# Altium PCB DUTBoard.PcbDoc (part 2 of 3)
Units mil, origin at the board's own origin, x right, y up, seen from the top; angles counter-clockwise.
Board outline 5475 x 5475 mil, 4 copper layers (Top Layer, Mid-Layer 1, Mid-Layer 2, Bottom Layer); 87 components, 471 nets, 1701 pads, 264 vias.
Unrouted connection lines stored in the file: 752.
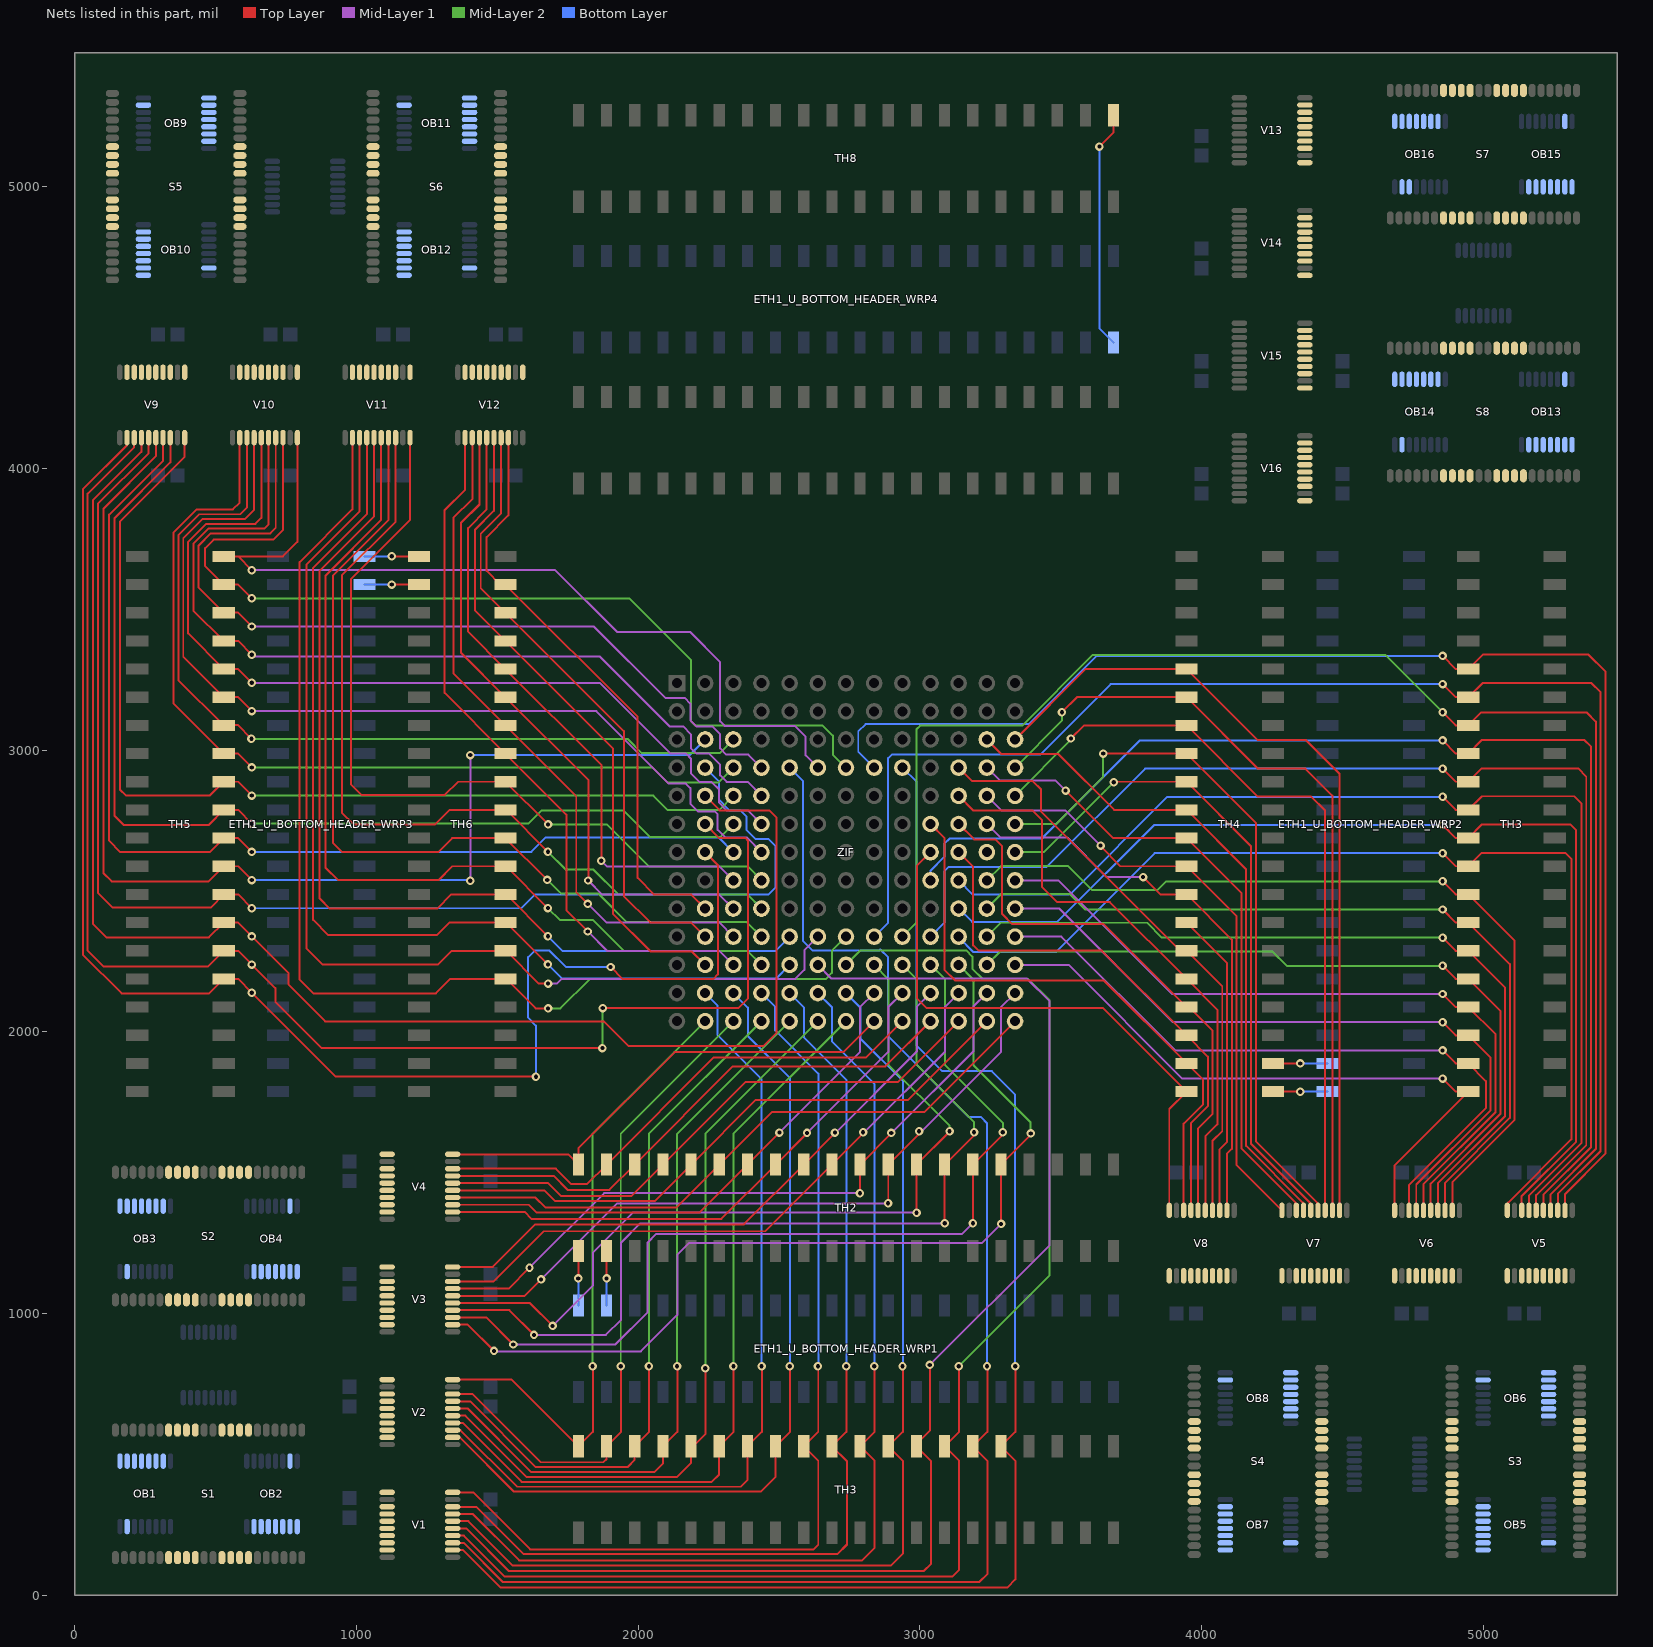
[diagram p4: the nets of this part, all layers, seen from the top]

## Via types
v1: diameter 30, hole 15, Top Layer to Bottom Layer, 264 vias

## Nets (pads, with @x,y where several pads share a name; then routed paths per layer and width w, separated by ;. In a path a pad name is that pad's centre, name@x,y a point inside that pad or via, vN(x,y) a via of type N, cw(c..) or ccw(c..) an arc to the next point about the centre after c; other vN are vias at no path point) (continued)
INSIDE_B33: TH6.39 V12.IVCC1 ZIF.34 | length 2111.8
  Top Layer w7: V12.IVCC1@1538.98,4108.86 1538.98,3832.98 1462,3756 1462,3636 1510.5,3587.5 TH6.39@1528.54,3587.5 1998,3118.04 1998,2546 2057,2487 2188,2487 ZIF.34@2237.5,2437.5
INSIDE_B34: TH6.38 V12.IVCC2 ZIF.35 | length 2216.2
  Top Layer w7: V12.IVCC2@1513.39,4108.86 1513.39,3840.39 1441,3768 1441,3575.04 TH6.38@1528.54,3487.5 1949,3067.04 1949,2481 2042,2388 2187,2388 ZIF.35@2237.5,2337.5
INSIDE_B35: TH6.37 V12.IVCC3 ZIF.36 | length 2323.6
  Top Layer w7: V12.IVCC3@1487.8,4108.86 1487.8,3848.8 1420,3781 1420,3496.04 TH6.37@1528.54,3387.5 1910,3006.04 1910,2419 2044,2285 2190,2285 ZIF.36@2237.5,2237.5
INSIDE_B36: TH6.36 V12.IVCC4 ZIF.37 | length 2222.5
  Top Layer w7: V12.IVCC4@1462.2,4108.86 1462.2,3854.2 1396,3788 1396,3420.04 TH6.36@1528.54,3287.5 1869,2947.04 v1(1869,2607)
  Mid-Layer 1 w7: v1(1869,2607) 1889,2587 2288,2587 ZIF.37@2337.5,2537.5
INSIDE_B37: TH6.35 V12.IVCC5 ZIF.38 | length 2345.4
  Top Layer w7: V12.IVCC5@1436.61,4108.86 1436.61,3871.61 1371,3806 1371,3345.04 TH6.35@1528.54,3187.5 1824,2892.04 v1@1824,2535
  Mid-Layer 1 w7: v1(1822,2537) 1872,2487 2288,2487 ZIF.38@2337.5,2437.5
INSIDE_B38: TH6.34 V12.IVCC6 ZIF.39 | length 2445
  Top Layer w7: V12.IVCC6@1411.02,4108.86 1411.02,3891.02 1344,3824 1344,3272.04 TH6.34@1528.54,3087.5 1780,2836.04 1780,2495 v1(1821,2454)
  Mid-Layer 1 w7: v1(1821,2454) 1887,2388 2287,2388 ZIF.39@2337.5,2337.5
INSIDE_B39: TH6.33 V12.IVCC7 ZIF.40 | length 2558.9
  Top Layer w7: V12.IVCC7@1385.43,4108.86 1385.43,3924.43 1313,3852 1313,3203.04 TH6.33@1528.54,2987.5 1745,2771.04 1745,2432 v1(1821,2356)
  Mid-Layer 1 w7: v1(1821,2356) 1891,2286 2289,2286 ZIF.40@2337.5,2237.5
INSIDE_B40: TH6.32 V11.IVCC0 ZIF.41 | length 2954.1
  Top Layer w7: V11.IVCC0@1190.16,4108.86 1190.16,3817.16 981,3608 981,2877 1017,2841 1314,2841 1360.5,2887.5 TH6.32@1528.54,2887.5 v1(1680.04,2736)
  Mid-Layer 2 w7: v1(1680.04,2736) 1889,2736 2038,2587 2388,2587 ZIF.41@2437.5,2537.5
INSIDE_B41: TH6.31 V11.IVCC1 ZIF.42 | length 3097.6
  Top Layer w7: V11.IVCC1@1138.98,4108.86 1138.98,3810.98 948,3620 948,2778 990,2736 1279,2736 1330.5,2787.5 TH6.31@1528.54,2787.5 TH6.31@1545.5,2787.5 ; TH6.31@1531.04,2787.5 v1(1679.54,2639)
  Mid-Layer 2 w7: v1(1679.54,2639) 1742.54,2576 1841,2576 1929,2488 2387,2488 ZIF.42@2437.5,2437.5
INSIDE_B42: TH6.30 V11.IVCC2 ZIF.43 | length 3220.3
  Top Layer w7: V11.IVCC2@1113.39,4108.86 1113.39,3816.39 916,3619 916,2671 949,2638 1290,2638 1339.5,2687.5 TH6.30@1528.54,2687.5 ; TH6.30@1528.54,2687.5 v1(1677,2539)
  Mid-Layer 2 w7: v1(1677,2539) 1726,2490 1859,2490 1960,2389 2386,2389 ZIF.43@2437.5,2337.5
INSIDE_B43: TH6.29 V11.IVCC3 ZIF.44 | length 3336.9
  Top Layer w7: V11.IVCC3@1087.8,4108.86 1087.8,3816.8 890,3619 890,2583 935,2538 1291,2538 1340.5,2587.5 TH6.29@1528.54,2587.5 ; TH6.29@1531.04,2587.5 v1(1679.54,2439)
  Mid-Layer 2 w7: v1(1679.54,2439) 1722.54,2396 1840,2396 1950,2286 2389,2286 ZIF.44@2437.5,2237.5
INSIDE_B44: TH6.28 V11.IVCC4 ZIF.45 | length 3522.5
  Top Layer w7: V11.IVCC4@1062.2,4108.86 1062.2,3829.2 869,3636 869,2473 905,2437 1286,2437 1336.5,2487.5 TH6.28@1528.54,2487.5 ; TH6.28@1531.04,2487.5 v1(1679.54,2339)
  Bottom Layer w7: v1(1679.54,2339) 1732.54,2286 2486,2286 ZIF.45@2537.5,2337.5
INSIDE_B45: TH6.27 V11.IVCC5 ZIF.46 | length 3622.9
  Top Layer w7: V11.IVCC5@1036.61,4108.86 1036.61,3837.61 846,3647 846,2397 900,2343 1285,2343 1329.5,2387.5 TH6.27@1528.54,2387.5 ; TH6.27@1531.04,2387.5 v1(1679.54,2239)
  Bottom Layer w7: v1(1679.54,2239) 1729.54,2189 2489,2189 ZIF.46@2537.5,2237.5
INSIDE_B46: TH6.26 V11.IVCC6 ZIF.47 | length 3906.1
  Top Layer w7: V11.IVCC6@1011.02,4108.86 1011.02,3847.02 823,3659 823,2295 880,2238 1288,2238 1337.5,2287.5 TH6.26@1528.54,2287.5 ; TH6.26@1531.04,2287.5 1647.54,2171 v1(1680,2171)
  Mid-Layer 1 w7: v1(1680,2171) 1711.54,2171 1728.54,2188 2558,2188 2590,2220 2590,2290 ZIF.47@2637.5,2337.5
INSIDE_B47: TH6.25 V11.IVCC7 ZIF.48 | length 4174.5
  Top Layer w7: V11.IVCC7@985.43,4108.86 985.43,3854.43 798,3667 798,2185 847,2136 1282,2136 1333.5,2187.5 TH6.25@1528.54,2187.5 ; TH6.25@1531.04,2187.5 1635.54,2083 v1(1680,2083)
  Mid-Layer 2 w7: v1(1680,2083) 1723.54,2083 1827.54,2187 2665,2187 2687,2209 2687,2287 ZIF.48@2737.5,2337.5
INSIDE_B48: TH5.40 V10.IVCC0 ZIF.49 | length 3182.3
  Top Layer w7: TH5.40@528.54,3687.5 579.5,3687.5 ; v1@628,3639 579.5,3687.5 ; V10.IVCC0@790.16,4108.86 790.16,3739.16 738.5,3687.5 579.5,3687.5
  Mid-Layer 1 w7: v1(628.5,3638.5) 1705.5,3638.5 1925,3419 2184,3419 2291,3312 2291,3102 2307,3086 2555,3086 2594,3047 2594,2981 ZIF.49@2637.5,2937.5
INSIDE_B49: TH5.39 V10.IVCC1 ZIF.50 | length 3430.9
  Top Layer w7: v1@628,3539 579.5,3587.5 TH5.39@528.54,3587.5 463,3653.04 463,3717 493,3747 705,3747 738.98,3780.98 V10.IVCC1@738.98,4108.86
  Mid-Layer 2 w7: v1(628.5,3538.5) 1968.5,3538.5 2187,3320 2187,3103 2203,3087 2655,3087 2691,3051 2691,2984 ZIF.50@2737.5,2937.5
INSIDE_B50: TH5.38 V10.IVCC2 ZIF.51 | length 3095.4
  Top Layer w7: v1@628,3439 579.5,3487.5 TH5.38@528.54,3487.5 440,3576.04 440,3726 483,3769 694,3769 713.39,3788.39 V10.IVCC2@713.39,4108.86
  Mid-Layer 1 w7: v1(628.5,3438.5) 1842.5,3438.5 2096,3185 2165,3185 2185,3165 2185,3105 2206,3084 2263,3084 2291,3056 2291,3006 2313,2984 2391,2984 ZIF.51@2437.5,2937.5
INSIDE_B51: TH5.37 V10.IVCC3 ZIF.52 | length 3179.4
  Top Layer w7: v1@628,3339 579.5,3387.5 TH5.37@528.54,3387.5 421,3495.04 421,3733 474,3786 672,3786 687.8,3801.8 V10.IVCC3@687.8,4108.86
  Mid-Layer 1 w7: v1(628.5,3338.5) 635,3332 1863,3332 2111,3084 2159,3084 2187,3056 2187,3007 2206,2988 2251,2988 2291,2948 2291,2910 2314,2887 2388,2887 ZIF.52@2437.5,2837.5
INSIDE_B52: TH5.36 V10.IVCC4 ZIF.53 | length 3278.7
  Top Layer w7: v1@628,3239 579.5,3287.5 TH5.36@528.54,3287.5 402,3414.04 402,3739 466,3803 641,3803 662.2,3824.2 V10.IVCC4@662.2,4108.86
  Mid-Layer 1 w7: v1(628.5,3238.5) 1863.5,3238.5 2115,2987 2170,2987 2187,2970 2187,2917 2218,2886 2261,2886 2287,2860 2287,2813 2315,2785 2390,2785 ZIF.53@2437.5,2737.5
INSIDE_B53: TH5.35 V10.IVCC5 ZIF.54 | length 3374.6
  Top Layer w7: v1@628,3139 579.5,3187.5 TH5.35@528.54,3187.5 385,3331.04 385,3752 453,3820 604,3820 636.61,3852.61 V10.IVCC5@636.61,4108.86
  Mid-Layer 1 w7: v1(628.5,3138.5) 1851.5,3138.5 2109,2881 2169,2881 2185,2865 2185,2809 2212,2782 2272,2782 2282,2772 2282,2717 2309,2690 2385,2690 ZIF.54@2437.5,2637.5
INSIDE_B54: TH5.34 V10.IVCC6 ZIF.55 | length 3145.4
  Top Layer w7: TH5.34@527,3089.04 577.96,3089.04 v1@626.46,3040.54 ; TH5.34@528.54,3087.5 368,3248.04 368,3763 442,3837 588,3837 611.02,3860.02 V10.IVCC6@611.02,4108.86
  Mid-Layer 2 w7: v1(626.96,3040.04) 1961.96,3040.04 2013,2989 2289,2989 ZIF.55@2337.5,3037.5
INSIDE_B55: TH5.33 V10.IVCC7 ZIF.56 | length 3241.1
  Top Layer w7: V10.IVCC7@585.5,4108.79 585.5,3878.5 561,3854 433,3854 350,3771 350,3166.04 TH5.33@528.54,2987.5 579.5,2987.5 v1@628,2939
  Mid-Layer 2 w7: v1(628.5,2938.5) 2050.5,2938.5 2105,2884 2284,2884 ZIF.56@2337.5,2937.5
INSIDE_B56: TH5.32 V9.IVCC0 ZIF.57 | length 3612.3
  Top Layer w7: V9.IVCC0@390.16,4108.86 390.16,4041.16 160,3811 160,2860 181,2839 480.04,2839 TH5.32@528.54,2887.5 579.5,2887.5 v1@628,2839
  Mid-Layer 2 w7: v1(628.5,2838.5) 2053.5,2838.5 2105,2787 2287,2787 ZIF.57@2337.5,2837.5
INSIDE_B57: TH5.31 V9.IVCC1 ZIF.58 | length 3754.1
  Top Layer w7: V9.IVCC1@338.98,4108.86 338.98,4020.98 141,3823 141,2767 174,2734 475.04,2734 TH5.31@528.54,2787.5 579.5,2787.5 v1@628,2739
  Mid-Layer 2 w7: v1(628.5,2738.5) 1609.5,2738.5 1657,2786 1947,2786 2042,2691 2291,2691 ZIF.58@2337.5,2737.5
INSIDE_B58: TH5.30 V9.IVCC2 ZIF.59 | length 3825.4
  Top Layer w7: V9.IVCC2@313.39,4108.86 313.39,4027.39 122,3836 122,2678 162,2638 479.04,2638 TH5.30@528.54,2687.5 579.5,2687.5 v1@628,2639
  Bottom Layer w7: v1(628.5,2638.5) 1620.5,2638.5 1672,2690 2285,2690 ZIF.59@2337.5,2637.5
INSIDE_B59: TH5.29 V9.IVCC3 ZIF.60 | length 4282.3
  Top Layer w7: V9.IVCC3@287.8,4108.86 287.8,4042.8 102,3857 102,2563 131,2534 475.04,2534 TH5.29@528.54,2587.5 579.5,2587.5 v1@628,2539
  Mid-Layer 1 w7: v1(1404,2536) v1(1404,2982)
  Bottom Layer w7: v1(628.5,2538.5) 1404.5,2538.5 v1@1405,2538 ; v1(1404,2982) 2182,2982 ZIF.60@2237.5,3037.5
INSIDE_B60: TH5.28 V9.IVCC4 ZIF.61 | length 4765
  Top Layer w7: V9.IVCC4@262.2,4108.86 262.2,4054.2 82,3874 82,2493 134,2441 482.04,2441 TH5.28@528.54,2487.5 579.5,2487.5 v1@628,2439
  Bottom Layer w7: v1(628.5,2438.5) 1584.5,2438.5 1633,2487 2462,2487 2487,2512 2487,2660 2463,2684 2417,2684 2384,2717 2384,2765 2364,2785 2325,2785 2287,2823 2287,2888 ZIF.61@2237.5,2937.5
INSIDE_B61: TH5.27 V9.IVCC5 ZIF.62 | length 5539.4
  Top Layer w7: V9.IVCC5@236.61,4108.86 236.61,4058.61 64,3886 64,2383 112,2335 476.04,2335 TH5.27@528.54,2387.5 579.5,2387.5 v1@628,2339 ; v1(628.5,2338.5) 759,2208 759,2167 889,2037 1878,2037 1966,1949 2443,1949 2491,1997 2491,2122.53 2491,2760 2465,2786 2289,2786 ZIF.62@2237.5,2837.5
INSIDE_B62: TH5.26 V9.IVCC6 ZIF.63 | length 5342.1
  Top Layer w7: V9.IVCC6@211.02,4108.86 211.02,4075.02 46,3910 46,2288 103,2231 472.04,2231 TH5.26@528.54,2287.5 579.5,2287.5 v1@628,2239 ; v1(628.5,2238.5) 712,2155 712,2106 876,1942 v1(1873,1942) ; v1(1874,2084) 2355,2084 2389,2118 2389,2679 2381,2687 2288,2687 ZIF.63@2237.5,2737.5
  Mid-Layer 2 w7: v1(1873,1942) v1@1873,2084
INSIDE_B63: TH5.25 V9.IVCC7 ZIF.64 | length 5352.9
  Top Layer w7: V9.IVCC7@185.43,4108.86 185.43,4082.43 29,3926 29,2273 166,2136 477.04,2136 TH5.25@528.54,2187.5 579.5,2187.5 v1@628,2139 ; v1(628.5,2138.5) 926,1841 v1@1639,1841 ; v1(1902,2230) 1945,2187 2266,2187 2283,2204 2283,2592 ZIF.64@2237.5,2637.5
  Bottom Layer w7: v1(1637,1840) 1637,2022 1609,2050 1609,2265 1632,2288 1685,2288 1743,2230 v1(1902,2230)
INSIDE_B64: TH4.40 V8.IVCC0 ZIF.65 | length 2080.2
  Top Layer w7: ZIF.65@3037.5,2637.5 2989,2589 2989,2119 3024,2084 3649.96,2084 TH4.40@3946.46,1787.5 3884.84,1725.89 V8.IVCC0@3884.84,1366.14
INSIDE_B65: TH4.39 V8.IVCC1 ZIF.66 | length 2109.4
  Top Layer w7: ZIF.66@3037.5,2737.5 3087,2688 3087,2220 3125,2182 3651.96,2182 TH4.39@3946.46,1887.5 4005,1828.96 4005,1743.04 3936.02,1674.07 V8.IVCC1@3936.02,1366.14
INSIDE_B66: TH4.38 V8.IVCC2 ZIF.67 | length 1919.3
  Top Layer w7: ZIF.67@3137.5,2637.5 3189,2586 3189,2307 3208,2288 3645.96,2288 TH4.38@3946.46,1987.5 4022,1911.96 4022,1736 3961.61,1675.61 V8.IVCC2@3961.61,1366.14
INSIDE_B67: TH4.37 V8.IVCC3 ZIF.68 | length 2006.4
  Top Layer w7: ZIF.68@3137.5,2737.5 3192,2683 3268,2683 3292,2659 3292,2418 3328,2382 3651.96,2382 TH4.37@3946.46,2087.5 ; TH4.37@3947.98,2094.02 4039,2003 4039,1709.21 3987.2,1657.41 V8.IVCC3@3987.2,1366.14
INSIDE_B68: TH4.36 V8.IVCC4 ZIF.69 | length 2102.2
  Top Layer w7: ZIF.69@3137.5,2837.5 3190,2785 3400,2785 3433,2752 3433,2514 3487,2460 3673.96,2460 TH4.36@3946.46,2187.5 4056,2077.96 4056,1671.61 4012.8,1628.41 V8.IVCC4@4012.8,1366.14
INSIDE_B69: TH4.35 V8.IVCC5 ZIF.70 | length 2089.6
  Top Layer w7: ZIF.70@3137.5,2937.5 3185,2890 3400,2890 3430,2860 3430,2781 TH4.35@3923.5,2287.5 ; TH4.35@3946.46,2287.5 4073,2160.96 4073,1647 4038.39,1612.39 V8.IVCC5@4038.39,1366.14
INSIDE_B70: TH4.34 V8.IVCC6 ZIF.71 | length 1095.5
  Top Layer w7: TH4.34@3946.46,2387.5 4090,2243.96 4090,1609 4063.98,1582.98 V8.IVCC6@4063.98,1366.14 V8.IVCC6@4061.24,1368.88
INSIDE_B71: TH4.33 V8.IVCC7 ZIF.72 | length 2007.6
  Top Layer w7: v1(3792,2549) 3853.5,2487.5 TH4.33@3946.46,2487.5 4107,2326.96 4107,1584.52 4089.57,1567.09 V8.IVCC7@4089.57,1366.14
  Mid-Layer 1 w7: ZIF.72@3237.5,2737.5 3285,2690 3522,2690 3663,2549 v1(3792,2549)
INSIDE_B72: TH4.32 V7.IVCC0 ZIF.73 | length 2176.8
  Top Layer w7: v1@3641,2662 v1(3641,2661) 3641,2658 3711.5,2587.5 TH4.32@3946.46,2587.5 4124,2409.96 4124,1526.98 V7.IVCC0@4284.84,1366.14
  Mid-Layer 1 w7: ZIF.73@3237.5,2837.5 3289,2786 3516,2786 v1(3641,2661)
INSIDE_B73: TH4.31 V7.IVCC1 ZIF.74 | length 2295.2
  Top Layer w7: v1(3517,2856) 3685.5,2687.5 TH4.31@3946.46,2687.5 4141,2492.96 4141,1586.1 4333.28,1393.82 4333.28,1368.88 V7.IVCC1@4336.02,1366.14
  Mid-Layer 1 w7: ZIF.74@3237.5,2937.5 3283,2892 3481,2892 v1(3517,2856)
INSIDE_B74: TH4.30 V7.IVCC2 ZIF.75 | length 2405.8
  Top Layer w7: ZIF.75@3237.5,3037.5 3289,2986 3491,2986 3689.5,2787.5 TH4.30@3946.46,2787.5 4158,2575.96 4158,1594.69 4358.87,1393.82 4358.87,1368.88 V7.IVCC2@4361.61,1366.14
INSIDE_B75: TH4.29 V7.IVCC3 ZIF.76 | length 2415
  Top Layer w7: v1@3689,2887 3689.5,2887.5 TH4.29@3946.46,2887.5 4175,2658.96 4175,1603.28 4384.46,1393.82 4384.46,1368.88 V7.IVCC3@4387.2,1366.14
  Mid-Layer 2 w7: ZIF.76@3337.5,2637.5 3439.5,2637.5 v1(3688,2886)
INSIDE_B76: TH4.28 V7.IVCC4 ZIF.77 | length 2575.7
  Top Layer w7: v1(3650.5,2987.5) TH4.28@3946.46,2987.5 4192,2741.96 4192,1611.87 4410.05,1393.82 4410.05,1368.88 V7.IVCC4@4412.8,1366.14
  Mid-Layer 2 w7: ZIF.77@3337.5,2737.5 3483.5,2737.5 3650.5,2904.5 v1(3650.5,2987.5)
INSIDE_B77: TH4.27 V7.IVCC5 ZIF.78 | length 2751.8
  Top Layer w7: v1(3536,3041) 3582.5,3087.5 TH4.27@3946.46,3087.5 4198.96,2835 4388.77,2835 4438.39,2785.39 V7.IVCC5@4438.39,1366.14
  Mid-Layer 2 w7: ZIF.78@3337.5,2837.5 3536,3036 v1(3536,3041)
INSIDE_B78: TH4.26 V7.IVCC6 ZIF.79 | length 2864.3
  Top Layer w7: v1(3504,3134) 3557.5,3187.5 TH4.26@3946.46,3187.5 4199.96,2934 4368,2934 4464,2838 V7.IVCC6@4464,1366.17
  Mid-Layer 2 w7: ZIF.79@3337.5,2937.5 3504,3104 v1(3504,3134)
INSIDE_B79: TH4.25 V7.IVCC7 ZIF.80 | length 2962.6
  Top Layer w7: ZIF.80@3337.5,3037.5 3587.5,3287.5 TH4.25@3946.46,3287.5 4197.96,3036 4368.52,3036 4489.57,2914.95 V7.IVCC7@4489.57,1366.14 V7.IVCC7@4492.31,1368.88
INSIDE_B80: TH3.40@4946.46,1787.5 V6.IVCC0 ZIF.81 | length 2325.1
  Top Layer w7: V6.IVCC0@4684.84,1366.14 4684.84,1525.89 TH3.40@4946.46,1787.5 4901.5,1787.5 v1(4855,1834)
  Mid-Layer 1 w7: ZIF.81@3337.5,2237.5 3527.5,2237.5 3931,1834 v1(4855,1834)
INSIDE_B81: TH3.39@4946.46,1887.5 V6.IVCC1 ZIF.82 | length 2456.1
  Top Layer w7: V6.IVCC1@4736.02,1366.14 4736.02,1456.27 5009,1729.25 5009,1824.96 TH3.39@4946.46,1887.5 4901.5,1887.5 v1(4855,1934)
  Mid-Layer 1 w7: ZIF.82@3337.5,2337.5 3338,2338 3502,2338 3906,1934 v1(4855,1934)
INSIDE_B82: TH3.38@4946.46,1987.5 V6.IVCC2 ZIF.83 | length 2563
  Top Layer w7: V6.IVCC2@4764.35,1368.88 V6.IVCC2@4761.61,1366.14 4761.61,1457.82 5026,1722.21 5026,1907.96 TH3.38@4946.46,1987.5 4901.5,1987.5 v1(4855,2034)
  Mid-Layer 1 w7: ZIF.83@3337.5,2437.5 3494.5,2437.5 3898,2034 v1(4855,2034)
INSIDE_B83: TH3.37@4946.46,2087.5 V6.IVCC3 ZIF.84 | length 2666.5
  Top Layer w7: V6.IVCC3@4789.95,1368.88 V6.IVCC3@4787.2,1366.14 4787.2,1459.37 5043,1715.17 5043,1990.96 TH3.37@4946.46,2087.5 4901.5,2087.5 v1(4855,2134)
  Mid-Layer 1 w7: ZIF.84@3337.5,2537.5 3491.5,2537.5 3895,2134 v1(4855,2134)
INSIDE_B84: TH3.36@4946.46,2187.5 V6.IVCC4 ZIF.85 | length 2743.7
  Top Layer w7: V6.IVCC4@4815.54,1368.88 V6.IVCC4@4812.8,1366.14 4812.8,1460.92 5060,1708.12 5060,2073.96 TH3.36@4946.46,2187.5 4901.5,2187.5 v1(4855,2234)
  Mid-Layer 2 w7: ZIF.85@3237.5,2237.5 3285,2285 4251,2285 4302,2234 v1(4855,2234)
INSIDE_B85: TH3.35@4946.46,2287.5 V6.IVCC5 ZIF.86 | length 2844.9
  Top Layer w7: V6.IVCC5@4838.39,1366.14 4838.39,1462.47 5077,1701.08 5077,2156.96 TH3.35@4946.46,2287.5 4901.5,2287.5 v1(4855,2334)
  Mid-Layer 2 w7: ZIF.86@3237.5,2337.5 3287,2387 3806,2387 3859,2334 v1(4855,2334)
INSIDE_B86: TH3.34@4946.46,2387.5 V6.IVCC6 ZIF.87 | length 2950.1
  Top Layer w7: v1(4855,2434) 4901.5,2387.5 TH3.34@4946.46,2387.5 5094,2239.96 5094,1694.04 4863.98,1464.02 V6.IVCC6@4863.98,1366.14
  Mid-Layer 2 w7: ZIF.87@3237.5,2437.5 3289,2489 3532,2489 3587,2434 v1(4855,2434)
INSIDE_B87: TH3.33@4946.46,2487.5 V6.IVCC7 ZIF.88 | length 3077.6
  Top Layer w7: v1(4855,2534) 4901.5,2487.5 TH3.33@4946.46,2487.5 5111,2322.96 5111,1687 4889.57,1465.57 V6.IVCC7@4889.57,1366.14
  Mid-Layer 2 w7: ZIF.88@3237.5,2537.5 3288,2588 3526,2588 3610,2504 3844,2504 3874,2534 v1(4855,2534)
INSIDE_B88: TH3.32@4946.46,2587.5 V5.IVCC0 ZIF.89 | length 3732.4
  Top Layer w7: v1(4855,2634) 4901.5,2587.5 TH3.32@4946.46,2587.5 4992.96,2634 5292,2634 5312,2614 5312,1618.23 5087.58,1393.82 5087.58,1368.88 V5.IVCC0@5084.84,1366.14
  Bottom Layer w7: ZIF.89@3137.5,2337.5 3137.5,2335.5 3190,2283 3482,2283 3833,2634 v1(4855,2634)
INSIDE_B89: TH3.31@4946.46,2687.5 V5.IVCC1 ZIF.90 | length 3830.5
  Top Layer w7: v1(4855,2734) 4901.5,2687.5 TH3.31@4946.46,2687.5 4994.96,2736 5308,2736 5329,2715 5329,1610.08 5136.02,1417.11 V5.IVCC1@5136.02,1366.14
  Bottom Layer w7: ZIF.90@3137.5,2437.5 3185,2390 3487,2390 3831,2734 v1(4855,2734)
INSIDE_B90: TH3.30@4946.46,2787.5 V5.IVCC2 ZIF.91 | length 3946.9
  Top Layer w7: v1(4855,2834) 4901.5,2787.5 TH3.30@4946.46,2787.5 4994.96,2836 5323,2836 5348,2811 5348,1605.04 5161.61,1418.66 V5.IVCC2@5161.61,1366.14
  Bottom Layer w7: ZIF.91@3137.5,2537.5 3188,2487 3531,2487 3878,2834 v1(4855,2834)
INSIDE_B91: TH3.29@4946.46,2887.5 V5.IVCC3 ZIF.92 | length 4346.2
  Top Layer w7: v1(4855,2934) 4901.5,2887.5 TH3.29@4946.46,2887.5 4993.96,2935 5336,2935 5365,2906 5365,1598 5187.2,1420.2 V5.IVCC3@5187.2,1366.14
  Bottom Layer w7: ZIF.92@3037.5,2337.5 3087,2387 3087,2570 3102,2585 3450,2585 3799,2934 v1(4855,2934)
INSIDE_B92: TH3.28@4946.46,2987.5 V5.IVCC4 ZIF.93 | length 4361.7
  Top Layer w7: v1(4855,3034) 4901.5,2987.5 TH3.28@4946.46,2987.5 4994.96,3036 5357,3036 5382,3011 5382,1590.96 5212.8,1421.75 V5.IVCC4@5212.8,1366.14
  Bottom Layer w7: ZIF.93@3037.5,2537.5 3037.5,2571.5 3087,2621 3087,2667 3106,2686 3433,2686 3781,3034 v1(4855,3034)
INSIDE_B93: TH3.27@4946.46,3087.5 V5.IVCC5 ZIF.94 | length 5215.8
  Top Layer w7: v1(4855,3134) 4901.5,3087.5 TH3.27@4946.46,3087.5 4992.96,3134 5366,3134 5399,3101 5399,1583.92 5238.39,1423.3 V5.IVCC5@5238.39,1366.14
  Mid-Layer 2 w7: ZIF.94@2937.5,2337.5 2987,2387 2987,3073 3001,3087 3363,3087 3614,3338 4651,3338 v1(4855,3134)
INSIDE_B94: TH3.26@4946.46,3187.5 V5.IVCC6 ZIF.95 | length 5247.6
  Top Layer w7: v1(4855,3234) 4901.5,3187.5 TH3.26@4946.46,3187.5 4996.96,3238 5383,3238 5416,3205 5416,1576.88 5264,1424.88 V5.IVCC6@5264,1366.17
  Bottom Layer w7: ZIF.95@2837.5,2337.5 2887,2387 2887,2971 2900,2984 3427,2984 3677,3234 v1(4855,3234)
INSIDE_B95: TH3.25@4946.46,3287.5 V5.IVCC7 ZIF.96 | length 4952.6
  Top Layer w7: v1(4855,3334) 4901.5,3287.5 TH3.25@4946.46,3287.5 4997.96,3339 5373,3339 5433,3279 5433,1567 5289.57,1423.57 V5.IVCC7@5289.57,1366.14
  Bottom Layer w7: ZIF.96@2837.5,2937.5 2781,2994 2781,3066 2807,3092 3386,3092 3628,3334 v1(4855,3334)
INSIDE_B96: TH2.40 V4.IVCC0 ZIF.97 | length 1756.3
  Top Layer w7: V4.IVCC0@1341.14,1565.16 1750.89,1565.16 TH2.40@1787.5,1528.54 1787.5,1586.5 2129,1928 2728,1928 ZIF.97@2837.5,2037.5
INSIDE_B97: TH2.39 V4.IVCC1 ZIF.98 | length 1858.8
  Top Layer w7: V4.IVCC1@1341.14,1513.98 1708.02,1513.98 1763,1459 1817.96,1459 TH2.39@1887.5,1528.54 2266.96,1908 2808,1908 ZIF.98@2937.5,2037.5
INSIDE_B98: TH2.38 V4.IVCC2 ZIF.99 | length 1964.7
  Top Layer w7: V4.IVCC2@1341.14,1488.39 1699.61,1488.39 1749,1439 1897.96,1439 TH2.38@1987.5,1528.54 2335.96,1877 2877,1877 ZIF.99@3037.5,2037.5
INSIDE_B99: TH2.37 V4.IVCC3 ZIF.100 | length 2072.3
  Top Layer w7: V4.IVCC3@1341.14,1462.8 1680.2,1462.8 1726,1417 1975.96,1417 TH2.37@2087.5,1528.54 2379.96,1821 2921,1821 ZIF.100@3137.5,2037.5
INSIDE_B100: TH2.36 V4.IVCC4 ZIF.101 | length 2176.7
  Top Layer w7: V4.IVCC4@1341.14,1437.2 1666.8,1437.2 1705,1399 2057.96,1399 TH2.36@2187.5,1528.54 2416.96,1758 2958,1758 ZIF.101@3237.5,2037.5
INSIDE_B101: TH2.35 V4.IVCC5 ZIF.102 | length 2284.3
  Top Layer w7: V4.IVCC5@1341.14,1411.61 1635.39,1411.61 1670,1377 2135.96,1377 TH2.35@2287.5,1528.54 2473.96,1715 3015,1715 ZIF.102@3337.5,2037.5
INSIDE_B102: TH2.34 V4.IVCC6 ZIF.103 | length 1927
  Top Layer w7: V4.IVCC6@1341.14,1386.02 1611.98,1386.02 1640,1358 2216.96,1358 TH2.34@2387.5,1528.54 v1(2501,1642.04) v1@2504.04,1642.04
  Mid-Layer 1 w7: v1(2501,1642.04) 2787,1928.04 2787,2087 ZIF.103@2837.5,2137.5
INSIDE_B103: TH2.33 V4.IVCC7 ZIF.104 | length 2032.1
  Top Layer w7: V4.IVCC7@1341.14,1360.43 1596.57,1360.43 1621,1336 2294.96,1336 TH2.33@2487.5,1528.54 2599,1640.04 v1(2599,1641)
  Mid-Layer 1 w7: v1(2599,1641) 2599.96,1641 2888,1929.04 2888,2088 ZIF.104@2937.5,2137.5
INSIDE_B104: TH2.32 V3.IVCC0 ZIF.105 | length 2194
  Top Layer w7: V3.IVCC0@1341.14,1165.16 1484.16,1165.16 1635,1316 2374.96,1316 TH2.32@2587.5,1528.54 2698,1639.04 v1(2698,1642)
  Mid-Layer 1 w7: v1(2698,1642) 2700.96,1642 2989,1930.04 2989,2089 ZIF.105@3037.5,2137.5
INSIDE_B105: TH2.31 V3.IVCC1 ZIF.106 | length 2315.7
  Top Layer w7: V3.IVCC1@1341.14,1113.98 1486.98,1113.98 1665,1292 2450.96,1292 TH2.31@2687.5,1528.54 2798,1639.04 v1(2798,1643)
  Mid-Layer 1 w7: v1(2798,1643) 2801.96,1643 3089,1930.04 3089,2089 ZIF.106@3137.5,2137.5
INSIDE_B106: TH2.30 V3.IVCC2 ZIF.107 | length 2483.7
  Top Layer w7: V3.IVCC2@1341.14,1088.39 1540.39,1088.39 v1(1614,1162) ; v1@2787.5,1427.5 TH2.30@2787.5,1528.54 2898,1639.04 v1(2898,1641)
  Mid-Layer 1 w7: v1(1614,1162) 1879,1427 v1(2787,1427) ; v1(2898,1641) 2899.96,1641 3190,1931.04 3190,2090 ZIF.107@3237.5,2137.5
INSIDE_B107: TH2.29 V3.IVCC3 ZIF.108 | length 2620.2
  Top Layer w7: V3.IVCC3@1341.14,1062.8 1596.8,1062.8 v1(1655,1121) ; v1(2887,1391) 2887.5,1391.5 TH2.29@2887.5,1528.54 2997,1638.04 v1(2997,1647)
  Mid-Layer 1 w7: v1(1655,1121) 1925,1391 v1(2887,1391) ; v1(2997,1647) 3005.96,1647 3287,1928.04 3287,2087 ZIF.108@3337.5,2137.5
INSIDE_B108: TH2.28 V3.IVCC4 ZIF.109 | length 2954.7
  Top Layer w7: V3.IVCC4@1341.14,1037.2 1614.8,1037.2 v1(1696,956) ; v1(2988,1358) 2987.5,1358.5 TH2.28@2987.5,1528.54 3105,1646.04 v1(3105,1647)
  Mid-Layer 1 w7: v1(1696,956) 1840,1100 1840,1217 1981,1358 v1(2988,1358)
  Mid-Layer 2 w7: ZIF.109@2837.5,2237.5 2888,2187 2888,1882.96 3105,1665.96 v1(3105,1647)
INSIDE_B109: TH2.27 V3.IVCC5 ZIF.110 | length 3174.1
  Top Layer w7: V3.IVCC5@1341.14,1011.61 1542.39,1011.61 v1(1630,924) ; v1(3088,1320) 3087.5,1320.5 TH2.27@3087.5,1528.54 3192,1633.04 v1(3192,1643)
  Mid-Layer 1 w7: v1(1630,924) 1885,924 1939,978 1939,1252 2007,1320 v1(3088,1320)
  Mid-Layer 2 w7: ZIF.110@2937.5,2237.5 2988,2187 2988,1882.96 3192,1678.96 v1(3192,1643)
INSIDE_B110: TH2.26 V3.IVCC6 ZIF.111 | length 3277.8
  Top Layer w7: V3.IVCC6@1341.14,986.02 1459.98,986.02 v1(1556,890) ; v1(3188,1320) 3187.5,1320.5 TH2.26@3187.5,1528.54 3294,1635.04 v1(3294,1643)
  Mid-Layer 1 w7: v1(1556,890) 1919,890 2033,1004 2033,1252 2063,1282 3149,1282 v1@3187.5,1320.5
  Mid-Layer 2 w7: ZIF.111@3037.5,2237.5 3089,2186 3089,1881.96 3294,1676.96 v1(3294,1643)
INSIDE_B111: TH2.25 V3.IVCC7 ZIF.112 | length 3368.2
  Top Layer w7: V3.IVCC7@1341.14,960.43 1394.57,960.43 v1(1488,867) ; v1(3288,1318) 3287.5,1318.5 TH2.25@3287.5,1528.54 3393,1634.04 v1(3393,1639.02)
  Mid-Layer 1 w7: v1(1488,867) 1489.5,865.5 2009.5,865.5 2139,995 2139,1209 2180,1250 3220,1250 v1(3288,1318)
  Mid-Layer 2 w7: ZIF.112@3137.5,2237.5 3190,2185 3190,1880.96 3393,1677.96 v1(3393,1639.02)
INSIDE_B112: TH3.40@1787.5,528.54 V2.IVCC0 ZIF.113 | length 2241.1
  Top Layer w7: V2.IVCC0@1341.14,765.16 1550.89,765.16 TH3.40@1787.5,528.54 1839,580.04 v1@1839,814
  Mid-Layer 2 w7: v1(1838,813) 1838,1638 ZIF.113@2237.5,2037.5
INSIDE_B113: TH3.39@1887.5,528.54 V2.IVCC1 ZIF.114 | length 2393.2
  Top Layer w7: V2.IVCC1@1341.14,713.98 1412.02,713.98 1654,472 1876,472 1887.5,483.5 TH3.39@1887.5,528.54 1939,580.04 v1@1939,814
  Mid-Layer 2 w7: v1(1938,813) 1938,1638 ZIF.114@2337.5,2037.5
INSIDE_B114: TH3.38@1987.5,528.54 V2.IVCC2 ZIF.115 | length 2498.4
  Top Layer w7: V2.IVCC2@1341.14,688.39 1403.61,688.39 1637,455 1962,455 1987.5,480.5 TH3.38@1987.5,528.54 2039,580.04 v1@2039,814
  Mid-Layer 2 w7: v1(2038,813) 2038,1638 ZIF.115@2437.5,2037.5
INSIDE_B115: TH3.37@2087.5,528.54 V2.IVCC3 ZIF.116 | length 2610.3
  Top Layer w7: V2.IVCC3@1341.14,662.8 1395.2,662.8 1621,437 2057,437 2087.5,467.5 TH3.37@2087.5,528.54 2139,580.04 v1@2139,814
  Mid-Layer 2 w7: v1(2138,813) 2138,1638 ZIF.116@2537.5,2037.5
INSIDE_B116: TH3.36@2187.5,528.54 V2.IVCC4 ZIF.117 | length 2720.4
  Top Layer w7: V2.IVCC4@1341.14,637.2 1386.8,637.2 1605,419 2136,419 2187.5,470.5 TH3.36@2187.5,528.54 ; TH3.36@2187.5,521 2239,572.5 v1@2239,806.46
  Mid-Layer 2 w7: v1(2238,805.46) 2238,1638 ZIF.117@2637.5,2037.5
INSIDE_B117: TH3.35@2287.5,528.54 V2.IVCC5 ZIF.118 | length 2841
  Top Layer w7: V2.IVCC5@1341.14,611.61 1376.39,611.61 1586,402 2261,402 2287.5,428.5 TH3.35@2287.5,528.54 2339,580.04 v1@2339,814
  Mid-Layer 2 w7: v1(2338,813) 2338,1638 ZIF.118@2737.5,2037.5
INSIDE_B118: TH3.34@2387.5,528.54 V2.IVCC6 ZIF.119 | length 2973.7
  Top Layer w7: V2.IVCC6@1341.14,586.02 1368.98,586.02 1570,385 2364,385 2387.5,408.5 TH3.34@2387.5,528.54 2439,580.04 v1@2439,814
  Bottom Layer w7: ZIF.119@2237.5,2137.5 2282,2093 2282,1988 2438,1832 v1(2438,813)
INSIDE_B119: TH3.33@2487.5,528.54 V2.IVCC7 ZIF.120 | length 3071.4
  Top Layer w7: V2.IVCC7@1341.14,560.43 1366.57,560.43 1559,368 2435,368 2487.5,420.5 TH3.33@2487.5,528.54 2539,580.04 v1@2539,814
  Bottom Layer w7: ZIF.120@2337.5,2137.5 2389,2086 2389,1985 2539.46,1834.54 2539.46,814.46 v1(2538,813)
INSIDE_B120: TH3.32@2587.5,528.54 V1.IVCC0 ZIF.121 | length 3474.6
  Top Layer w7: V1.IVCC0@1341.14,365.16 1413.84,365.16 1616,163 2623,163 2639,179 2639,477.04 TH3.32@2587.5,528.54 2639,580.04 v1@2639,814
  Bottom Layer w7: ZIF.121@2437.5,2137.5 2486,2089 2486,2005 2639.46,1851.54 2639.46,814.46 v1(2638,813)
INSIDE_B121: TH3.31@2687.5,528.54 V1.IVCC1 ZIF.122 | length 3569.8
  Top Layer w7: V1.IVCC1@1341.14,313.98 1425.02,313.98 1593,146 2707,146 2741,180 2741,475.04 TH3.31@2687.5,528.54 2739,580.04 v1@2739,814
  Bottom Layer w7: ZIF.122@2537.5,2137.5 2588,2087 2588,1980 2739.46,1828.54 2739.46,814.46 v1(2738,813)
INSIDE_B122: TH3.30@2787.5,528.54 V1.IVCC2 ZIF.123 | length 3681.6
  Top Layer w7: V1.IVCC2@1341.14,288.39 1412.61,288.39 1577,124 2795,124 2839,168 2839,477.04 TH3.30@2787.5,528.54 2839,580.04 v1@2839,814
  Bottom Layer w7: ZIF.123@2637.5,2137.5 2687,2088 2687,1966 2839.46,1813.54 2839.46,814.46 v1(2838,813)
INSIDE_B123: TH3.29@2887.5,528.54 V1.IVCC3 ZIF.124 | length 3799.3
  Top Layer w7: V1.IVCC3@1341.14,262.8 1397.2,262.8 1555,105 2896,105 2940,149 2940,476.04 TH3.29@2887.5,528.54 2939,580.04 v1@2939,814
  Bottom Layer w7: ZIF.124@2737.5,2137.5 2789,2086 2789,1976 2939.46,1825.54 2939.46,814.46 v1(2938,813)
INSIDE_B124: TH3.28@2987.5,528.54 V1.IVCC4 ZIF.125 | length 4860.9
  Top Layer w7: V1.IVCC4@1341.14,237.2 1388.8,237.2 1540,86 3014,86 3040,112 3040,476.04 TH3.28@2987.5,528.54 ; TH3.28@2984,533 3035.5,584.5 v1@3035.5,818.46
  Mid-Layer 1 w7: ZIF.125@2637.5,2237.5 2686,2189 3380,2189 3460,2109 3460,1242.96 v1(3034.5,817.46)
INSIDE_B125: TH3.27@3087.5,528.54 V1.IVCC5 ZIF.126 | length 4908.9
  Top Layer w7: V1.IVCC5@1341.14,211.61 1381.39,211.61 1527,66 3115,66 3139,90 3139,477.04 TH3.27@3087.5,528.54 3139,580.04 v1@3139,814
  Mid-Layer 2 w7: ZIF.126@2737.5,2237.5 2789,2289 3164,2289 3186,2267 3186,2224 3222,2188 3383,2188 3460,2111 3460,1135 v1(3138,813)
INSIDE_B126: TH3.26@3187.5,528.54 V1.IVCC6 ZIF.127 | length 5334
  Top Layer w7: V1.IVCC6@1341.14,186.02 1379.98,186.02 1519,47 3211,47 3239,75 3239,477.04 TH3.26@3187.5,528.54 3239,580.04 v1@3239,814
  Bottom Layer w7: ZIF.127@2537.5,2937.5 2585,2890 2585,2322 2618,2289 2856,2289 2859,2292 2887,2264 2887,1984 3174,1697 3217,1697 3238,1676 v1(3238,813)
INSIDE_B127: TH3.25@3287.5,528.54 V1.IVCC7 ZIF.128 | length 5258.5
  Top Layer w7: V1.IVCC7@1341.14,160.43 1378.57,160.43 1511,28 3311,28 3339,56 3339,477.04 TH3.25@3287.5,528.54 3339,580.04 v1@3339,814
  Bottom Layer w7: ZIF.128@2937.5,2937.5 2988,2887 2988,1951 3079,1860 3255,1860 3338,1777 v1(3338,813)
NetOB1_U_OB_WRP16_DS: OB16.DS
OB_D_B0: OB16.D0 S7.DATA0 V14.OVL0
OB_D_B1: OB16.D1 S7.DATA1 V14.OVL1
OB_D_B2: OB16.D2 S7.DATA2 V14.OVL2
OB_D_B3: OB16.D3 S7.DATA3 V14.OVL3
OB_D_B4: OB16.D4 S7.DATA4 V14.OVL4
OB_D_B5: OB16.D5 S7.DATA5 V14.OVL5
OB_D_B6: OB16.D6 S7.DATA6 V14.OVL6
OB_D_B7: OB16.D7 S7.DATA7 V14.OVL7
OB_D_B8: OB15.D0 S7.DATA8 V13.OVL0
OB_D_B9: OB15.D1 S7.DATA9 V13.OVL1
OB_D_B10: OB15.D2 S7.DATA10 V13.OVL2
OB_D_B11: OB15.D3 S7.DATA11 V13.OVL3
OB_D_B12: OB15.D4 S7.DATA12 V13.OVL4
OB_D_B13: OB15.D5 S7.DATA13 V13.OVL5
OB_D_B14: OB15.D6 S7.DATA14 V13.OVL6
OB_D_B15: OB15.D7 S7.DATA15 V13.OVL7
OB_D_B16: OB14.D0 S8.DATA0 V16.OVL0
OB_D_B17: OB14.D1 S8.DATA1 V16.OVL1
OB_D_B18: OB14.D2 S8.DATA2 V16.OVL2
OB_D_B19: OB14.D3 S8.DATA3 V16.OVL3
OB_D_B20: OB14.D4 S8.DATA4 V16.OVL4
OB_D_B21: OB14.D5 S8.DATA5 V16.OVL5
OB_D_B22: OB14.D6 S8.DATA6 V16.OVL6
OB_D_B23: OB14.D7 S8.DATA7 V16.OVL7
OB_D_B24: OB13.D0 S8.DATA8 V15.OVL0
OB_D_B25: OB13.D1 S8.DATA9 V15.OVL1
OB_D_B26: OB13.D2 S8.DATA10 V15.OVL2
OB_D_B27: OB13.D3 S8.DATA11 V15.OVL3
OB_D_B28: OB13.D4 S8.DATA12 V15.OVL4
OB_D_B29: OB13.D5 S8.DATA13 V15.OVL5
OB_D_B30: OB13.D6 S8.DATA14 V15.OVL6
OB_D_B31: OB13.D7 S8.DATA15 V15.OVL7
OB_D_B32: OB12.D0 S6.DATA0 V12.OVL0
OB_D_B33: OB12.D1 S6.DATA1 V12.OVL1
OB_D_B34: OB12.D2 S6.DATA2 V12.OVL2
OB_D_B35: OB12.D3 S6.DATA3 V12.OVL3
OB_D_B36: OB12.D4 S6.DATA4 V12.OVL4
OB_D_B37: OB12.D5 S6.DATA5 V12.OVL5
OB_D_B38: OB12.D6 S6.DATA6 V12.OVL6
OB_D_B39: OB12.D7 S6.DATA7 V12.OVL7
OB_D_B40: OB11.D0 S6.DATA8 V11.OVL0
OB_D_B41: OB11.D1 S6.DATA9 V11.OVL1
OB_D_B42: OB11.D2 S6.DATA10 V11.OVL2
OB_D_B43: OB11.D3 S6.DATA11 V11.OVL3
OB_D_B44: OB11.D4 S6.DATA12 V11.OVL4
OB_D_B45: OB11.D5 S6.DATA13 V11.OVL5
OB_D_B46: OB11.D6 S6.DATA14 V11.OVL6
OB_D_B47: OB11.D7 S6.DATA15 V11.OVL7
OB_D_B48: OB10.D0 S5.DATA0 V10.OVL0
OB_D_B49: OB10.D1 S5.DATA1 V10.OVL1
OB_D_B50: OB10.D2 S5.DATA2 V10.OVL2
OB_D_B51: OB10.D3 S5.DATA3 V10.OVL3
OB_D_B52: OB10.D4 S5.DATA4 V10.OVL4
OB_D_B53: OB10.D5 S5.DATA5 V10.OVL5
OB_D_B54: OB10.D6 S5.DATA6 V10.OVL6
OB_D_B55: OB10.D7 S5.DATA7 V10.OVL7
OB_D_B56: OB9.D0 S5.DATA8 V9.OVL0
OB_D_B57: OB9.D1 S5.DATA9 V9.OVL1
OB_D_B58: OB9.D2 S5.DATA10 V9.OVL2
OB_D_B59: OB9.D3 S5.DATA11 V9.OVL3
OB_D_B60: OB9.D4 S5.DATA12 V9.OVL4
OB_D_B61: OB9.D5 S5.DATA13 V9.OVL5
OB_D_B62: OB9.D6 S5.DATA14 V9.OVL6
OB_D_B63: OB9.D7 S5.DATA15 V9.OVL7
OB_D_B64: OB8.D0 S4.DATA0 V8.OVL0
OB_D_B65: OB8.D1 S4.DATA1 V8.OVL1
OB_D_B66: OB8.D2 S4.DATA2 V8.OVL2
OB_D_B67: OB8.D3 S4.DATA3 V8.OVL3
OB_D_B68: OB8.D4 S4.DATA4 V8.OVL4
OB_D_B69: OB8.D5 S4.DATA5 V8.OVL5
OB_D_B70: OB8.D6 S4.DATA6 V8.OVL6
OB_D_B71: OB8.D7 S4.DATA7 V8.OVL7
OB_D_B72: OB7.D0 S4.DATA8 V7.OVL0
OB_D_B73: OB7.D1 S4.DATA9 V7.OVL1
OB_D_B74: OB7.D2 S4.DATA10 V7.OVL2
OB_D_B75: OB7.D3 S4.DATA11 V7.OVL3
OB_D_B76: OB7.D4 S4.DATA12 V7.OVL4
OB_D_B77: OB7.D5 S4.DATA13 V7.OVL5
OB_D_B78: OB7.D6 S4.DATA14 V7.OVL6
OB_D_B79: OB7.D7 S4.DATA15 V7.OVL7
OB_D_B80: OB6.D0 S3.DATA0 V6.OVL0
OB_D_B81: OB6.D1 S3.DATA1 V6.OVL1
OB_D_B82: OB6.D2 S3.DATA2 V6.OVL2
OB_D_B83: OB6.D3 S3.DATA3 V6.OVL3
OB_D_B84: OB6.D4 S3.DATA4 V6.OVL4
OB_D_B85: OB6.D5 S3.DATA5 V6.OVL5
OB_D_B86: OB6.D6 S3.DATA6 V6.OVL6
OB_D_B87: OB6.D7 S3.DATA7 V6.OVL7
OB_D_B88: OB5.D0 S3.DATA8 V5.OVL0
OB_D_B89: OB5.D1 S3.DATA9 V5.OVL1
OB_D_B90: OB5.D2 S3.DATA10 V5.OVL2
OB_D_B91: OB5.D3 S3.DATA11 V5.OVL3
OB_D_B92: OB5.D4 S3.DATA12 V5.OVL4
OB_D_B93: OB5.D5 S3.DATA13 V5.OVL5
OB_D_B94: OB5.D6 S3.DATA14 V5.OVL6
OB_D_B95: OB5.D7 S3.DATA15 V5.OVL7
OB_D_B96: OB4.D0 S2.DATA0 V4.OVL0
OB_D_B97: OB4.D1 S2.DATA1 V4.OVL1
OB_D_B98: OB4.D2 S2.DATA2 V4.OVL2
OB_D_B99: OB4.D3 S2.DATA3 V4.OVL3
OB_D_B100: OB4.D4 S2.DATA4 V4.OVL4
OB_D_B101: OB4.D5 S2.DATA5 V4.OVL5
OB_D_B102: OB4.D6 S2.DATA6 V4.OVL6
OB_D_B103: OB4.D7 S2.DATA7 V4.OVL7
OB_D_B104: OB3.D0 S2.DATA8 V3.OVL0
OB_D_B105: OB3.D1 S2.DATA9 V3.OVL1
OB_D_B106: OB3.D2 S2.DATA10 V3.OVL2
OB_D_B107: OB3.D3 S2.DATA11 V3.OVL3
OB_D_B108: OB3.D4 S2.DATA12 V3.OVL4
OB_D_B109: OB3.D5 S2.DATA13 V3.OVL5
OB_D_B110: OB3.D6 S2.DATA14 V3.OVL6
OB_D_B111: OB3.D7 S2.DATA15 V3.OVL7
OB_D_B112: OB2.D0 S1.DATA0 V2.OVL0
OB_D_B113: OB2.D1 S1.DATA1 V2.OVL1
OB_D_B114: OB2.D2 S1.DATA2 V2.OVL2
OB_D_B115: OB2.D3 S1.DATA3 V2.OVL3
OB_D_B116: OB2.D4 S1.DATA4 V2.OVL4
OB_D_B117: OB2.D5 S1.DATA5 V2.OVL5
OB_D_B118: OB2.D6 S1.DATA6 V2.OVL6
OB_D_B119: OB2.D7 S1.DATA7 V2.OVL7
OB_D_B120: OB1.D0 S1.DATA8 V1.OVL0
OB_D_B121: OB1.D1 S1.DATA9 V1.OVL1
OB_D_B122: OB1.D2 S1.DATA10 V1.OVL2
OB_D_B123: OB1.D3 S1.DATA11 V1.OVL3
OB_D_B124: OB1.D4 S1.DATA12 V1.OVL4
OB_D_B125: OB1.D5 S1.DATA13 V1.OVL5
OB_D_B126: OB1.D6 S1.DATA14 V1.OVL6
OB_D_B127: OB1.D7 S1.DATA15 V1.OVL7
OUTSIDE_L_W0_U_BOTTOM_HEADER_WRP1: ETH1_U_BOTTOM_HEADER_WRP1.1 TH2.1 | length 192.9
  Top Layer w7: v1(1787.5,1124.5) TH2.1@1787.5,1221.46
  Bottom Layer w7: ETH1_U_BOTTOM_HEADER_WRP1.1@1787.5,1028.54 v1(1787.5,1124.5)
OUTSIDE_L_W0_U_BOTTOM_HEADER_WRP2: ETH1_U_BOTTOM_HEADER_WRP2.1 TH4.1 | length 192.9
  Top Layer w7: TH4.1@4253.54,1787.5 v1(4349.5,1787.5)
  Bottom Layer w7: v1(4349.5,1787.5) ETH1_U_BOTTOM_HEADER_WRP2.1@4446.46,1787.5
OUTSIDE_L_W0_U_BOTTOM_HEADER_WRP3: ETH1_U_BOTTOM_HEADER_WRP3.1 TH6.1 | length 193.6
  Top Layer w7: v1@1125,3688 v1(1125.5,3687.5) TH6.1@1221.46,3687.5
  Bottom Layer w7: ETH1_U_BOTTOM_HEADER_WRP3.1@1028.54,3687.5 v1(1125.5,3687.5)
OUTSIDE_L_W0_U_BOTTOM_HEADER_WRP4: ETH1_U_BOTTOM_HEADER_WRP4.1 TH8.1 | length 848.9
  Top Layer w7: v1(3637,5142) 3687.5,5192.5 TH8.1@3687.5,5253.54
  Bottom Layer w7: v1(3637,5142) 3637,4496.96 ETH1_U_BOTTOM_HEADER_WRP4.1@3687.5,4446.46
OUTSIDE_L_W1_U_BOTTOM_HEADER_WRP1: ETH1_U_BOTTOM_HEADER_WRP1.2 TH2.2 | length 192.9
  Top Layer w7: v1(1887.5,1124.5) TH2.2@1887.5,1221.46
  Bottom Layer w7: ETH1_U_BOTTOM_HEADER_WRP1.2@1887.5,1028.54 v1(1887.5,1124.5)
OUTSIDE_L_W1_U_BOTTOM_HEADER_WRP2: ETH1_U_BOTTOM_HEADER_WRP2.2 TH4.2 | length 192.9
  Top Layer w7: TH4.2@4253.54,1887.5 v1(4349.5,1887.5)
  Bottom Layer w7: v1(4349.5,1887.5) ETH1_U_BOTTOM_HEADER_WRP2.2@4446.46,1887.5
OUTSIDE_L_W1_U_BOTTOM_HEADER_WRP3: ETH1_U_BOTTOM_HEADER_WRP3.2 TH6.2 | length 192.9
  Top Layer w7: v1(1125.5,3587.5) TH6.2@1221.46,3587.5
  Bottom Layer w7: ETH1_U_BOTTOM_HEADER_WRP3.2@1028.54,3587.5 v1(1125.5,3587.5)